# Altium PCB STM32F103RCT6_V2.1.pcbdoc (part 1 of 3)
Units mm, origin at the board's own origin, x right, y up, seen from the top; angles counter-clockwise.
Board outline 90.04 x 74.73 mm, 2 copper layers (Top Layer, Bottom Layer); 58 components, 75 nets, 672 pads, 147 vias.
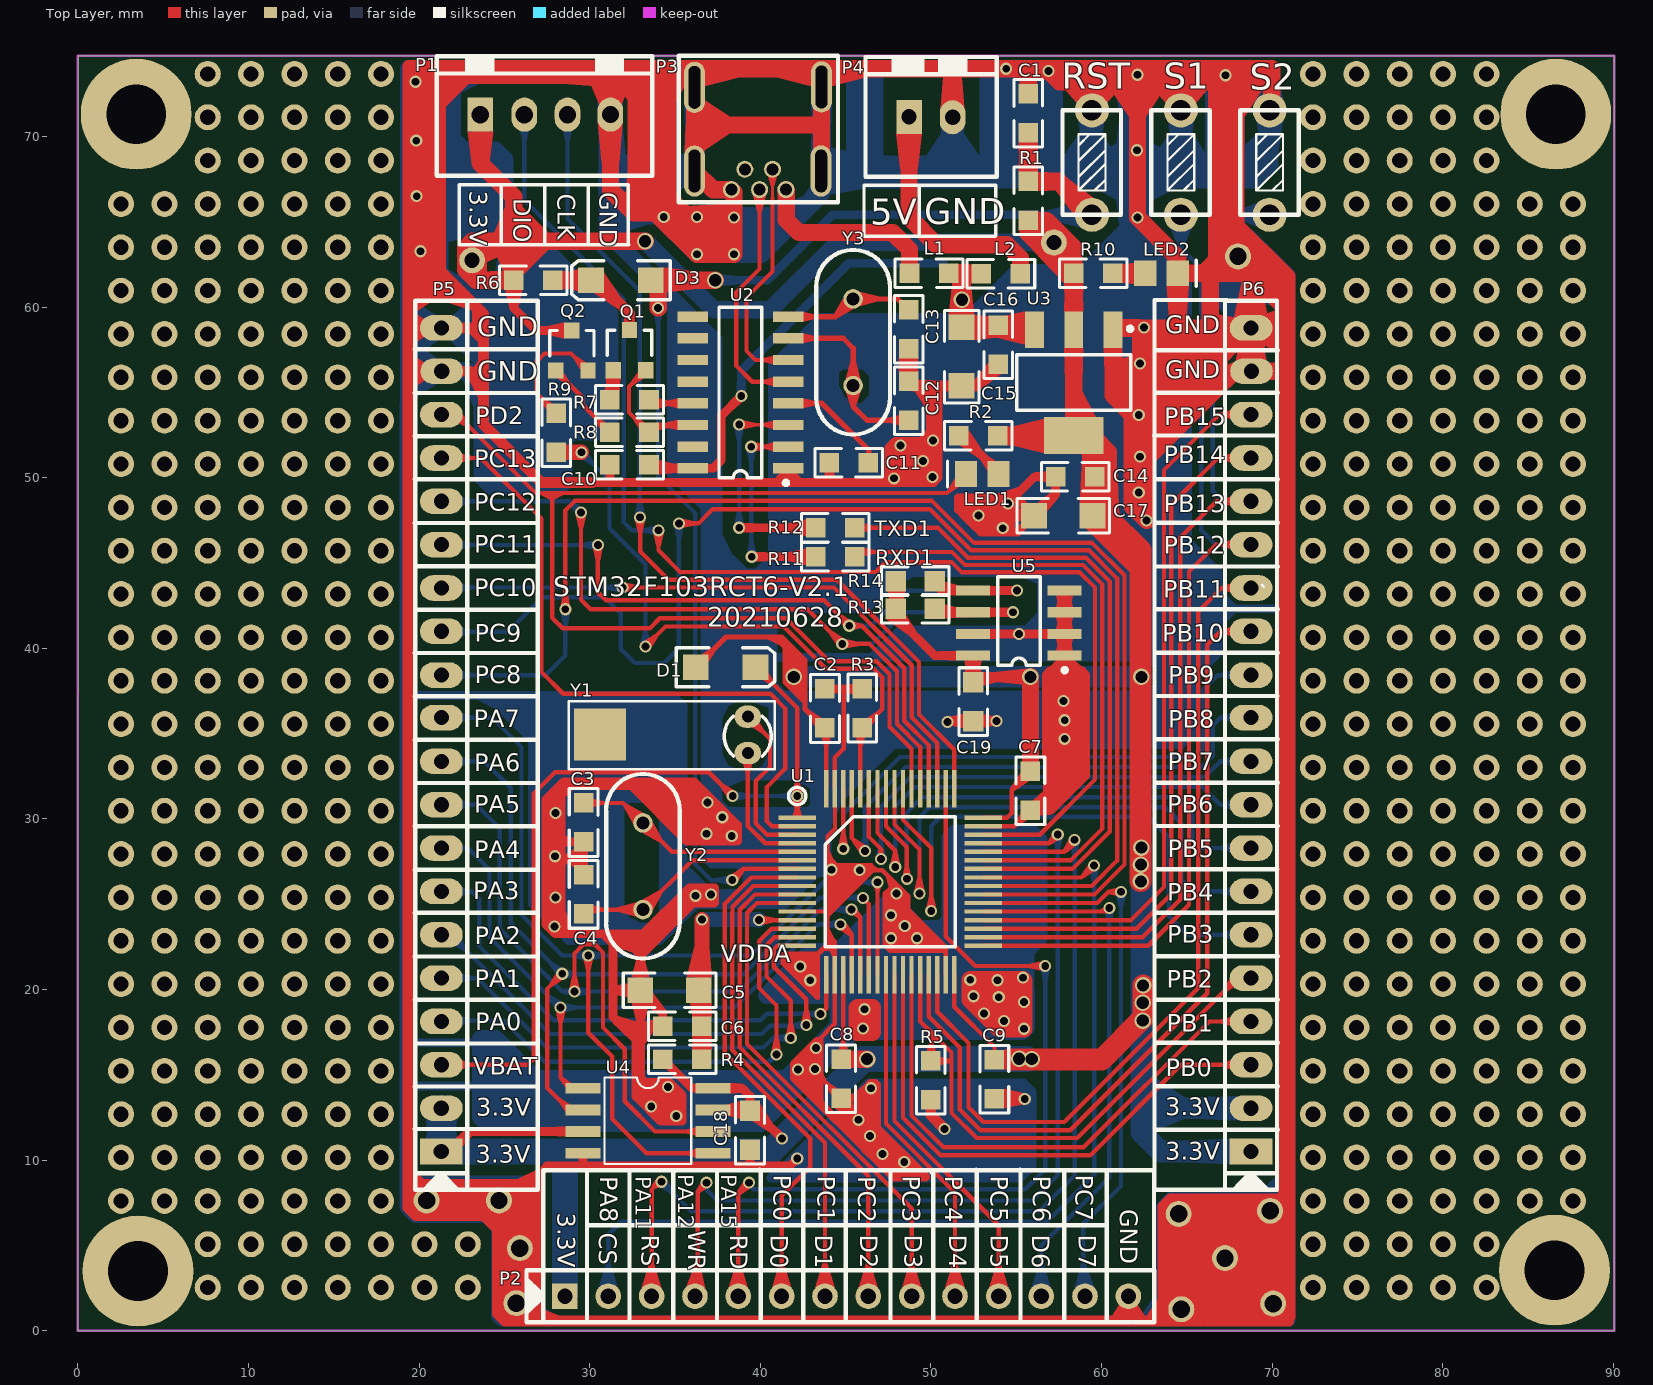
[diagram p0: Top Layer view]
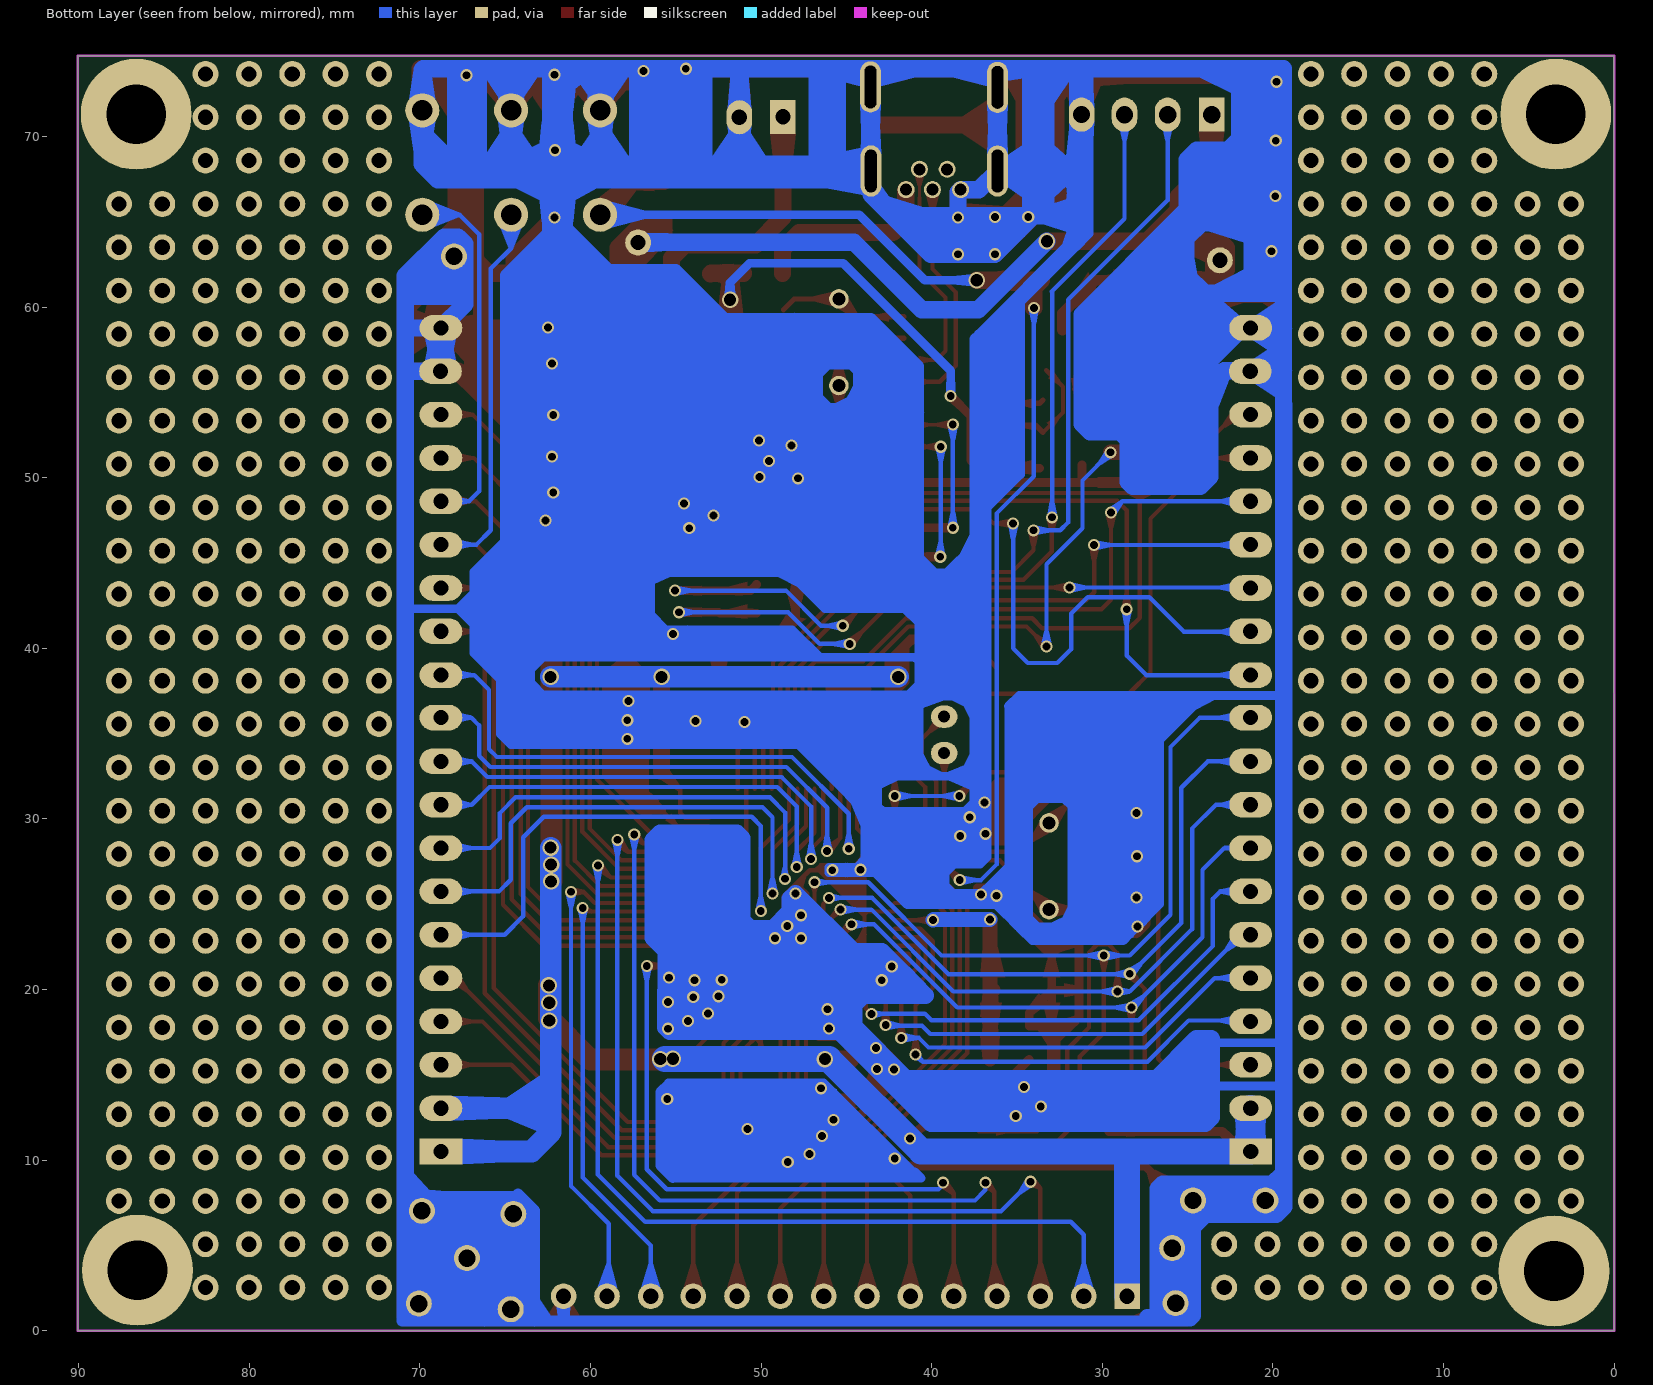
[diagram p1: Bottom Layer view, seen from below]

## Layer stack, top to bottom
Top Solder: solder mask 0.0102, Solder Resist, Dk 3.5
Top Layer: signal copper 0.0356
Dielectric 1: dielectric 0.32, FR-4, Dk 4.8
Bottom Layer: signal copper 0.0356
Bottom Solder: solder mask 0.0102, Solder Resist, Dk 3.5

## Board outline
0.024,74.727 90.043,74.727 90.043,0 0,0

## Design rules (kind name [scope] priority, off if disabled: settings)
Clearance [All] p1: gap=0.178
ComponentClearance [All] p1 off: gap=0.254 collisioncheckmode=3 verticalgap=0.254 showdistances=FALSE
MinimumSolderMaskSliver [All] p1: minsoldermaskwidth=0.178
PolygonConnect [All] p1: connectstyle=Relief reliefconductorwidth=0.254 reliefentries=4 polygonreliefangle="90 Angle" airgapwidth=0.254
RoutingVias [All] p1: holewidth=0.711 width=1.27 viastyle="Through Hole" minholewidth=0.711 minwidth=1.27 maxholewidth=0.711 maxwidth=1.27
SilkToBoardRegionClearance [All] p1 off:
SilkToSilkClearance [All] p1 off: silktosilkclearance=0.254
SilkToSolderMaskClearance [IsPad] p1 off: minsilkscreentomaskgap=0.254 clearancetoexposedcopper=TRUE
SolderMaskExpansion [All] p1: expansion=0.102
Width [All] p1: maxlimit=2.54 minlimit=0.178 preferedwidth=0.254 minimp=50.000000 maximp=50.000000 favimp=50.000000
25 further rules are at their usual default settings.

## Components (designator, comment, footprint, x,y, rotation, side; value= is the part's Value field where it differs from the comment)
C1 "104" 0805#1 55.702,72.492 r270 top
C2 "104" 0805#1 43.79,35.331 r90 top
C3 "22P" 0805#1 29.642,28.651 r90 top
C4 "22P" 0805#1 29.642,26.721 r270 top
C5 "10uF" 1206 36.398,19.964 r180 top
C6 "104" 0805#1 36.576,17.856 r180 top
C7 "104" 0805#1 55.829,32.791 r270 top
C8 "104" 0805#1 44.729,15.926 r270 top
C9 "104" 0805#1 53.721,15.9 r270 top
C10 "0.1uF" 0805#1 33.477,50.749 r180 top
C11 "0.1uF" 0805#1 44.044,50.876 r0 top
C12 "22P" 0805#1 48.692,55.651 r270 top
C13 "22P" 0805#1 48.692,57.556 r90 top
C14 "104" 0805#1 59.588,50.063 r180 top
C15 "10uF" 1206 51.791,58.801 r270 top
C16 "104" 0805#1 53.95,58.928 r270 top
C17 "10uF" 1206 59.461,47.777 r180 top
C18 "104" 0805#2 39.395,10.617 r90 top
C19 "104" 0805#2 52.476,38.024 r270 top
D1 "1N4148" "二极管 贴片 IN4148" 36.22,38.887 r0 top
D3 "1N4148" "二极管 贴片 IN4148" 33.579,61.57 r180 top
L1 "500mA" 0805#1 51.029,61.976 r180 top
L2 "500mA" 0805#1 52.959,61.951 r0 top
LED1 "红色" LED0805 53.95,50.216 r180 top
LED2 "红色" LED0805 62.56,61.976 r0 top
P1 "XH2.54-4" VH2.54_4 23.597,71.272 r180 top
P2 "2.54 1*14" "单排插针 2.54 1*14" 28.55,2.032 r0 top
P3 "USB-MINI座" "USB MINI DIP" 41.504,66.878 r270 top
P4 "power" VH2.54_2 48.717,71.145 r180 top
P5 "2.54 1*20" "单排插针 2.54 1*20" 21.311,10.516 r90 top
P6 "2.54 1*20" "单排插针 2.54 1*20" 68.758,10.516 r90 top
Q1 "8050" sot23b 32.334,58.649 r0 top
Q2 "8550" sot23b 28.956,58.623 r0 top
R1 "10K" 0805#1 55.702,65.075 r90 top
R2 "1K" 0805#1 53.924,52.451 r180 top
R3 "100K" 0805#1 45.974,37.643 r270 top
R4 "10R" 0805#1 34.29,15.926 r0 top
R5 "100K" 0805#1 49.987,13.538 r90 top
R6 "10K" 0805#1 27.838,61.57 r180 top
R7 "1K" 0805#1 31.191,54.559 r0 top
R8 "1K" 0805#1 31.191,52.654 r0 top
R9 "1K" 0805#1 28.042,51.486 r90 top
R10 "1K" 0805#1 60.655,61.976 r180 top
R11 "0" 0805#1 43.256,45.364 r0 top
R12 "0" 0805#1 43.256,47.066 r0 top
R13 "10k" 0805#2 47.93,42.316 r0 top
R14 "10k" 0805#2 47.93,43.942 r0 top
RST "key" "按键 轻触  6*3" 59.436,71.526 r0 top
S1 "key" "按键 轻触  6*3" 64.643,71.526 r0 top
S2 "key" "按键 轻触  6*3" 69.85,71.526 r0 top
U1 "STM32F103RCT6" LQFP64 42.164,30.074 r0 top
U2 "CH340G" SOIC16 41.504,50.546 r90 top
U3 "SPX1117M3-3.3" SOT223 60.681,58.674 r180 top
U4 "W25Q64" SO8-W 29.616,14.224 r0 top
U5 "24C02" SOIC8 57.836,39.573 r90 top
Y1 "32.768K" "晶振 卧 BCY-W2/D3.1" 39.268,35.992 r180 top
Y2 "8M" "晶振 BCY-W2/E4.7" 33.122,24.689 r90 top
Y3 "12M" "晶振 BCY-W2/E4.7" 45.441,55.397 r90 top

## Footprints (in the part's own frame and the unit in brackets; to place one, negate y for a bottom-side part, rotate by r counter-clockwise, add the part's x,y. Pads: shape width x height; smd on the part's side, far side on the other; paste and mask are expansions set on the pad)
0805#1 [mil]
  rect 45x45 smd: 1(0,0) 2(90,0)
  silkscreen extent -33,-33 123,33
0805#2 [mil]
  rect 47.24x47.24 smd: 1(0,0) 2(90,0)
  silkscreen extent -33,-33 123,33
1206 [mm]
  rect 1.5x1.5 smd: 1(-0.005,0) 2(3.424,0)
  silkscreen extent -1.01,-1.01 4.43,1.02
LED0805 [mm] "Chip Capacitor; Body 2.0 x 1.2 mm (LxW typ)"
  rect 1.3x1.5 smd: 1(0,0) 2(1.9,0)
  silkscreen extent 2.98,-0.76 2.98,0.76
LQFP64 [mm]
  rect 2.2x0.254 smd: 1(0,0) 2(0,-0.5) 3(0,-1) 4(0,-1.5) 5(0,-2) 6(0,-2.5) 7(0,-3) 8(0,-3.5) 9(0,-4) 10(0,-4.5) 11(0,-5) 12(0,-5.5) 13(0,-6) 14(0,-6.5) 15(0,-7) 16(0,-7.5) 33(10.9,-7.5) 34(10.9,-7) 35(10.9,-6.5) 36(10.9,-6) 37(10.9,-5.5) 38(10.9,-5) 39(10.9,-4.5) 40(10.9,-4) 41(10.9,-3.5) 42(10.9,-3) 43(10.9,-2.5) 44(10.9,-2) 45(10.9,-1.5) 46(10.9,-1) 47(10.9,-0.5) 48(10.9,0)
  rect 0.254x2.2 smd: 17(1.7,-9.2) 18(2.2,-9.2) 19(2.7,-9.2) 20(3.2,-9.2) 21(3.7,-9.2) 22(4.2,-9.2) 23(4.7,-9.2) 24(5.2,-9.2) 25(5.7,-9.2) 26(6.2,-9.2) 27(6.7,-9.2) 28(7.2,-9.2) 29(7.7,-9.2) 30(8.2,-9.2) 31(8.7,-9.2) 32(9.2,-9.2) 49(9.2,1.7) 50(8.7,1.7) 51(8.2,1.7) 52(7.7,1.7) 53(7.2,1.7) 54(6.7,1.7) 55(6.2,1.7) 56(5.7,1.7) 57(5.2,1.7) 58(4.7,1.7) 59(4.2,1.7) 60(3.7,1.7) 61(3.2,1.7) 62(2.7,1.7) 63(2.2,1.7) 64(1.7,1.7)
  silkscreen extent -0.51,-7.56 9.26,1.78
SO8-W [mil]
  rect 80x25 smd: 1(-0.4,0) 2(-0.4,-50) 3(-0.4,-100) 4(-0.4,-150) 5(299.6,-150) 6(299.6,-100) 7(299.6,-50) 8(299.6,0)
  silkscreen extent 50,-175 250,25
SOIC8 [mm]
  rect 0.6x2 smd: 1(0,0) 2(1.27,0) 3(2.54,0) 4(3.81,0) 5(3.81,5.367) 6(2.54,5.367) 7(1.27,5.367) 8(0,5.367)
  silkscreen extent -0.97,-0.13 4.62,3.93
SOIC16 [mil] "Small Outline; 16 Leads; Body Width 3.9 mm; Pitch 1.27 mm"
  rect 23.62x70 smd: 1(0,-5) 2(50,-5) 3(100,-5) 4(150,-5) 5(200,-5) 6(250,-5) 7(300,-5) 8(350,-5) 9(350,215) 10(300,215) 11(250,215) 12(200,215) 13(150,215) 14(100,215) 15(50,215) 16(0,215)
  silkscreen extent -38,-5 372,155
sot23b [mm]
  rect 0.9x0.95 smd: 1(-0.95,-2.35) 2(0.95,-2.35) 3(0,0)
  silkscreen extent -1.3,-1.48 1.3,0
SOT223 [mm] "SOT-223/SC-73; 4 Leads; Body 6.7 x 7.3 mm, inc. leads (LxW max)"
  rect 1.1x2.15 smd: 1(0.011,-0.001) 2(2.311,-0.001) 3(4.611,-0.001)
  rect 3.5x2.15 smd: 4(2.311,6.199)
  silkscreen extent -1.11,-0.18 5.66,4.72
"USB MINI DIP" [mm]
  round 1 hole 0.7: 1(0,0) 2(-1.194,-0.787) 3(0,-1.549) 4(-1.194,-2.413) 5(0,-3.2)
  oval 3x1.22 hole 0.7 slot 2.5 at 0 deg: 6(-1.093,-5.36) 7(-5.995,-5.36) 8(-1.093,2.057) 9(-6.02,2.082)
  silkscreen extent -7.85,-6.27 0.74,3.05
VH2.54_2 [mm]
  rect 1.5x2 hole 0.9: 1(0,0)
  oval 1.5x2 hole 0.9: 2(-2.55,0.025)
  silkscreen extent -5.14,-3.51 2.56,3.51
VH2.54_4 [mm]
  rect 1.5x2 hole 1.016: 1(0,0)
  oval 1.5x2 hole 1.016: 2(-2.58,0) 3(-5.105,0)
  oval 1.5x2 hole 1: 4(-7.62,0)
  silkscreen extent -10.06,-3.43 2.56,3.58
"二极管 贴片 IN4148" [mm] "SMT LED; 2 Flat Leads"
  rect 1.5x1.5 smd: 1(0,0) 2(3.5,0)
  silkscreen extent -1.15,-1.15 4.62,1.15
"单排插针 2.54 1*14" [mm]
  rect 1.5x1.5 hole 0.889: 1(0,0)
  round 1.5 hole 0.889: 2(2.54,0) 3(5.08,0) 4(7.62,0) 5(10.16,0) 6(12.7,0) 7(15.24,0) 8(17.78,0) 9(20.32,0) 10(22.86,0) 11(25.425,0) 12(27.915,0) 13(30.48,0) 14(33.02,0)
  silkscreen extent -2.25,-1.52 34.54,1.52
"单排插针 2.54 1*20" [mm]
  rect 1.5x2.5 hole 0.9: 1(0,0)
  oval 1.5x2.5 hole 0.9: 2(2.54,0)
  oval 1.5x2.5 hole 0.889: 3(5.08,0) 4(7.62,0) 5(10.16,0) 6(12.7,0) 7(15.24,0) 8(17.78,0) 9(20.32,0) 10(22.86,0) 11(25.425,0) 12(27.915,0) 13(30.48,0) 14(33.02,0) 15(35.56,0) 16(38.1,0) 17(40.64,0) 18(43.18,0) 19(45.72,-0.025) 20(48.26,0)
  silkscreen extent -2.25,-1.52 49.86,1.52
"按键 轻触  6*3" [mm]
  round 2 hole 1.2: 1(0,0) 2(0,-6.121)
  silkscreen extent -1.73,-6.12 1.7,0
"晶振 BCY-W2/E4.7" [mil] "Quartz Crystal, Thru-Hole; 2 Leads; Body 11.35 x 4.65 x 13.46 mm (LxWxH max)"
  round 45 hole 30: 1(0,0) 2(200,0)
  silkscreen extent -113,-85 313,85
"晶振 卧 BCY-W2/D3.1" [mm]
  oval 1.554x1.3 hole 0.7: 1(0,0) 2(0,2.134)
  rect 3.048x3.048 smd: ""(8.666,1.041)
  silkscreen extent -1.57,-0.91 10.49,3.07

## Part data
C1 C2 C3 C4 C5 C6 C7 C8 C9 C10 C11 C12 C13 C14 C15 C16 C17: library part "贴片电容 0805"
C18 C19: library part C, "无极性贴片电容"
D1 D3: library part "二极管 贴片 1N4148"
L1 L2: library part 保险_自恢复
LED1 LED2: library part "发光二极管 Φ3", "D_RED_D"
P1: library part "联结件 XH2.54-4"
P2: library part "联结件 单排插针 2.54 1*14"
P3: library part "联结件 USB-MINI座"
P4: library part "联结件 电源插头座"
P5 P6: library part "联结件 单排插针 2.54 1*20"
Q1: library part "三极管 贴片 NPN", "NPN 8050"
Q2: library part "三极管 贴片PNP", "PNP 8550"
R1 R4 R6 R7 R8 R9: library part "贴片电阻 0603"
R2 R3 R5 R10 R11 R12: library part "贴片电阻 0805"
R13 R14: library part R, "贴片电阻"
RST S1 S2: library part "按键 轻触 3*6"
U1: library part "贴片芯片 STM32F103RCT6"
U2: library part "贴片芯片 CH340G"
U3: library part "贴片芯片 SPX1117M3-5.0"
U4: library part W25Qxx, "外置Flash"
U5: library part 24Cxx, "外置EEPROM"
Y1 Y2 Y3: library part "晶振 直插矮"

## Free pads (board coordinates)
  round 6.5 hole 3.5: 0(3.429,71.298) 0(3.531,3.505) 0(86.538,3.556) 0(86.614,71.298)
  round 1.524 hole 1.016: 0(64.516,6.858) 1(69.875,7.036) 2(70.053,1.6) 3(64.668,1.27) 4(67.234,4.267) 5(20.447,7.645) 6(24.689,7.645) 7(25.705,1.626) 8(25.908,4.851) 9(67.996,62.967)
  round 1.524 hole 0.889: 2(2.54,7.62) 2(2.54,10.16) 2(2.54,12.7) 2(2.54,15.24) 2(2.54,17.78) 2(2.54,20.32) 2(2.54,22.86) 2(2.54,25.4) 2(2.54,27.94) 2(2.54,30.48) 2(2.54,33.02) 2(2.54,35.56) 2(2.54,38.1) 2(2.54,40.64) 2(2.54,43.18) 2(2.54,45.72) 2(2.54,48.26) 2(2.54,50.8) 2(2.54,53.34) 2(2.54,55.88) 2(2.54,58.42) 2(2.54,60.96) 2(2.54,63.5) 2(2.54,66.04) 2(5.08,7.62) 2(5.08,10.16) 2(5.08,12.7) 2(5.08,15.24) 2(5.08,17.78) 2(5.08,20.32) 2(5.08,22.86) 2(5.08,25.4) 2(5.08,27.94) 2(5.08,30.48) 2(5.08,33.02) 2(5.08,35.56) 2(5.08,38.1) 2(5.08,40.64) 2(5.08,43.18) 2(5.08,45.72) 2(5.08,48.26) 2(5.08,50.8) 2(5.08,53.34) 2(5.08,55.88) 2(5.08,58.42) 2(5.08,60.96) 2(5.08,63.5) 2(5.08,66.04) 2(7.62,2.54) 2(7.62,5.08) 2(7.62,7.62) 2(7.62,10.16) 2(7.62,12.7) 2(7.62,15.24) 2(7.62,17.78) 2(7.62,20.32) 2(7.62,22.86) 2(7.62,25.4) 2(7.62,27.94) 2(7.62,30.48) 2(7.62,33.02) 2(7.62,35.56) 2(7.62,38.1) 2(7.62,40.64) 2(7.62,43.18) 2(7.62,45.72) 2(7.62,48.26) 2(7.62,50.8) 2(7.62,53.34) 2(7.62,55.88) 2(7.62,58.42) 2(7.62,60.96) 2(7.62,63.5) 2(7.62,66.04) 2(7.62,68.58) 2(7.62,71.12) 2(7.62,73.66) 2(10.16,2.54) 2(10.16,5.08) 2(10.16,7.62) 2(10.16,10.16) 2(10.16,12.7) 2(10.16,15.24) 2(10.16,17.78) 2(10.16,20.32) 2(10.16,22.86) 2(10.16,25.4) 2(10.16,27.94) 2(10.16,30.48) 2(10.16,33.02) 2(10.16,35.56) 2(10.16,38.1) 2(10.16,40.64) 2(10.16,43.18) 2(10.16,45.72) 2(10.16,48.26) 2(10.16,50.8) 2(10.16,53.34) 2(10.16,55.88) 2(10.16,58.42) 2(10.16,60.96) 2(10.16,63.5) 2(10.16,66.04) 2(10.16,68.58) 2(10.16,71.12) 2(10.16,73.66) 2(12.7,2.54) 2(12.7,5.08) 2(12.7,7.62) 2(12.7,10.16) 2(12.7,12.7) 2(12.7,15.24) 2(12.7,17.78) 2(12.7,20.32) 2(12.7,22.86) 2(12.7,25.4) 2(12.7,27.94) 2(12.7,30.48) 2(12.7,33.02) 2(12.7,35.56) 2(12.7,38.1) 2(12.7,40.64) 2(12.7,43.18) 2(12.7,45.72) 2(12.7,48.26) 2(12.7,50.8) 2(12.7,53.34) 2(12.7,55.88) 2(12.7,58.42) 2(12.7,60.96) 2(12.7,63.5) 2(12.7,66.04) 2(12.7,68.58) 2(12.7,71.12) 2(12.7,73.66) 2(15.24,2.54) 2(15.24,5.08) 2(15.24,7.62) 2(15.24,10.16) 2(15.24,12.7) 2(15.24,15.24) 2(15.24,17.78) 2(15.24,20.32) 2(15.24,22.86) 2(15.24,25.4) 2(15.24,27.94) 2(15.24,30.48) 2(15.24,33.02) 2(15.24,35.56) 2(15.24,38.1) 2(15.24,40.64) 2(15.24,43.18) 2(15.24,45.72) 2(15.24,48.26) 2(15.24,50.8) 2(15.24,53.34) 2(15.24,55.88) 2(15.24,58.42) 2(15.24,60.96) 2(15.24,63.5) 2(15.24,66.04) 2(15.24,68.58) 2(15.24,71.12) 2(15.24,73.66) 2(17.78,2.54) 2(17.78,5.08) 2(17.78,7.62) 2(17.78,10.16) 2(17.78,12.7) 2(17.78,15.24) 2(17.78,17.78) 2(17.78,20.32) 2(17.78,22.86) 2(17.78,25.4) 2(17.78,27.94) 2(17.78,30.48) 2(17.78,33.02) 2(17.78,35.56) 2(17.78,38.1) 2(17.78,40.64) 2(17.78,43.18) 2(17.78,45.72) 2(17.78,48.26) 2(17.78,50.8) 2(17.78,53.34) 2(17.78,55.88) 2(17.78,58.42) 2(17.78,60.96) 2(17.78,63.5) 2(17.78,66.04) 2(17.78,68.58) 2(17.78,71.12) 2(17.78,73.66) 2(20.32,2.54) 2(20.32,5.08) 2(22.86,2.54) 2(22.86,5.08) 2(23.114,62.738) 2(57.201,63.779) 2(72.39,2.54) 2(72.39,5.08) 2(72.39,7.62) 2(72.39,10.16) 2(72.39,12.7) 2(72.39,15.24) 2(72.39,17.78) 2(72.39,20.32) 2(72.39,22.86) 2(72.39,25.4) 2(72.39,27.94) 2(72.39,30.48) 2(72.39,33.02) 2(72.39,35.56) 2(72.39,38.1) 2(72.39,40.64) 2(72.39,43.18) 2(72.39,45.72) 2(72.39,48.26) 2(72.39,50.8) 2(72.39,53.34) 2(72.39,55.88) 2(72.39,58.42) 2(72.39,60.96) 2(72.39,63.5) 2(72.39,66.04) 2(72.39,68.58) 2(72.39,71.12) 2(72.39,73.66) 2(74.93,2.54) 2(74.93,5.08) 2(74.93,7.62) 2(74.93,10.16) 2(74.93,12.7) 2(74.93,15.24) 2(74.93,17.78) 2(74.93,20.32) 2(74.93,22.86) 2(74.93,25.4) 2(74.93,27.94) 2(74.93,30.48) 2(74.93,33.02) 2(74.93,35.56) 2(74.93,38.1) 2(74.93,40.64) 2(74.93,43.18) 2(74.93,45.72) 2(74.93,48.26) 2(74.93,50.8) 2(74.93,53.34) 2(74.93,55.88) 2(74.93,58.42) 2(74.93,60.96) 2(74.93,63.5) 2(74.93,66.04) 2(74.93,68.58) 2(74.93,71.12) 2(74.93,73.66) 2(77.47,2.54) 2(77.47,5.08) 2(77.47,7.62) 2(77.47,10.16) 2(77.47,12.7) 2(77.47,15.24) 2(77.47,17.78) 2(77.47,20.32) 2(77.47,22.86) 2(77.47,25.4) 2(77.47,27.94) 2(77.47,30.48) 2(77.47,33.02) 2(77.47,35.56) 2(77.47,38.1) 2(77.47,40.64) 2(77.47,43.18) 2(77.47,45.72) 2(77.47,48.26) 2(77.47,50.8) 2(77.47,53.34) 2(77.47,55.88) 2(77.47,58.42) 2(77.47,60.96) 2(77.47,63.5) 2(77.47,66.04) 2(77.47,68.58) 2(77.47,71.12) 2(77.47,73.66) 2(80.01,2.54) 2(80.01,5.08) 2(80.01,7.62) 2(80.01,10.16) 2(80.01,12.7) 2(80.01,15.24) 2(80.01,17.78) 2(80.01,20.32) 2(80.01,22.86) 2(80.01,25.4) 2(80.01,27.94) 2(80.01,30.48) 2(80.01,33.02) 2(80.01,35.56) 2(80.01,38.1) 2(80.01,40.64) 2(80.01,43.18) 2(80.01,45.72) 2(80.01,48.26) 2(80.01,50.8) 2(80.01,53.34) 2(80.01,55.88) 2(80.01,58.42) 2(80.01,60.96) 2(80.01,63.5) 2(80.01,66.04) 2(80.01,68.58) 2(80.01,71.12) 2(80.01,73.66) 2(82.55,2.54) 2(82.55,5.08) 2(82.55,7.62) 2(82.55,10.16) 2(82.55,12.7) 2(82.55,15.24) 2(82.55,17.78) 2(82.55,20.32) 2(82.55,22.86) 2(82.55,25.4) 2(82.55,27.94) 2(82.55,30.48) 2(82.55,33.02) 2(82.55,35.56) 2(82.55,38.1) 2(82.55,40.64) 2(82.55,43.18) 2(82.55,45.72) 2(82.55,48.26) 2(82.55,50.8) 2(82.55,53.34) 2(82.55,55.88) 2(82.55,58.42) 2(82.55,60.96) 2(82.55,63.5) 2(82.55,66.04) 2(82.55,68.58) 2(82.55,71.12) 2(82.55,73.66) 2(85.09,7.62) 2(85.09,10.16) 2(85.09,12.7) 2(85.09,15.24) 2(85.09,17.78) 2(85.09,20.32) 2(85.09,22.86) 2(85.09,25.4) 2(85.09,27.94) 2(85.09,30.48) 2(85.09,33.02) 2(85.09,35.56) 2(85.09,38.1) 2(85.09,40.64) 2(85.09,43.18) 2(85.09,45.72) 2(85.09,48.26) 2(85.09,50.8) 2(85.09,53.34) 2(85.09,55.88) 2(85.09,58.42) 2(85.09,60.96) 2(85.09,63.5) 2(85.09,66.04) 2(87.63,7.62) 2(87.63,10.16) 2(87.63,12.7) 2(87.63,15.24) 2(87.63,17.78) 2(87.63,20.32) 2(87.63,22.86) 2(87.63,25.4) 2(87.63,27.94) 2(87.63,30.48) 2(87.63,33.02) 2(87.63,35.56) 2(87.63,38.1) 2(87.63,40.64) 2(87.63,43.18) 2(87.63,45.72) 2(87.63,48.26) 2(87.63,50.8) 2(87.63,53.34) 2(87.63,55.88) 2(87.63,58.42) 2(87.63,60.96) 2(87.63,63.5) 2(87.63,66.04)

## Via types
v1: diameter 0.711, hole 0.457, Top Layer to Bottom Layer, 132 vias
v2: diameter 0.965, hole 0.711, Top Layer to Bottom Layer, 15 vias

## Nets (pads, with @x,y where several pads share a name; then routed paths per layer and width w, separated by ;. In a path a pad name is that pad's centre, name@x,y a point inside that pad or via, vN(x,y) a via of type N, cw(c..) or ccw(c..) an arc to the next point about the centre after c; other vN are vias at no path point)
3.3V: C2.1 C7.1 C8.1 C9.1 C14.1 C17.1 C18.2 C19.1 D1.1 P1.1 P2.1 P5.1 P5.2 P6.1 P6.2 pad.2@23.114,62.738 pad.2@57.201,63.779 Q2.3 R1.1 R2.1 R4.1 R6.2 R10.2 R13.1 R14.1 U1.19 U1.32 U1.48 U1.64 U3.2 U3.4 U4.3 U4.7 U4.8 U5.8 | length 317.4
  Top Layer w0.254: U1.64@43.864,31.774 C2.1@43.864,35.257 ; C8.1@44.729,15.926 44.864,16.06 U1.19@44.864,20.874 ; U1.32@51.364,20.874 51.364,18.994 53.721,16.637 C9.1@53.721,15.9 ; U1.48@53.064,30.074 54.458,30.074 54.737,30.353 54.737,31.699 C7.1@55.829,32.791
  Top Layer w0.305: D1.1@36.22,38.887 37.998,40.665 40.869,40.665 ; C2.1@43.561,35.509 42.621,36.449 ; 40.869,40.665 41.453,40.081 41.453,38.024 42.291,37.186 ; 40.869,40.665 41.258,40.665 42.621,39.302 42.621,37.186 ; 42.291,37.186 42.621,37.186 ; 42.291,37.186 42.621,36.855 ; 42.621,36.449 42.621,36.855 ; 42.621,36.449 42.621,36.855 ; 42.621,36.855 42.621,37.186
  Top Layer w0.508: P5.1@21.311,10.516 21.819,10.516 22.987,11.684 U4.3@29.606,11.684 ; R6.2@25.552,61.57 25.552,59.944 26.873,58.623 Q2.3@28.956,58.623 ; R4.1@34.29,15.926 35.992,14.224 U4.8@37.226,14.224 38.938,14.224 39.395,13.767 C18.2@39.395,12.903 ; U4.7@37.226,12.954 39.345,12.954 C18.2@39.395,12.903 ; v1(41.275,11.278) 39.649,12.903 C18.2@39.395,12.903 ; R14.1@47.981,43.739 47.981,42.062 47.981,41.808 50.216,39.573 U5.8@52.469,39.573 52.469,38.031 C19.1@52.476,38.024 52.781,38.329 v2(55.829,38.329) ; U3.4@58.345,52.451 U3.4@58.369,52.475
  Top Layer w0.889: U3.4@58.369,52.475 59.487,51.358 59.588,51.256
  Top Layer w1.016: P1.1@23.597,71.272 23.597,68.428 25.552,66.472 25.552,63.856 ; v2(33.249,63.856) 25.552,63.856 ; C8.1@44.729,15.926 v2(46.253,15.926) ; R2.1@53.924,52.451 U3.4@58.345,52.451 ; C7.1@55.829,32.791 v2(55.829,38.329) ; 59.588,51.256 U3.4@59.588,52.299 ; 60.566,46.419 60.401,46.584 60.401,47.625 60.401,51.486 U3.4@59.588,52.299 ; pad.2@22.733,62.179 23.343,61.57 ; pad.2@22.733,62.179 pad.2@23.47,62.916 ; pad.2@22.733,62.179 22.733,63.475 23.114,63.856 24.409,63.856 ; 23.343,61.57 R6.2@25.552,61.57 25.552,63.856 ; 23.343,61.57 23.47,61.697 pad.2@23.47,62.916 ; pad.2@23.47,62.916 24.409,63.856 ; 24.409,63.856 25.552,63.856 ; R1.1@55.702,65.075 56.769,65.075 58.369,63.475 R10.2@58.369,62.408 ; R1.1@55.702,65.075 R10.2@58.369,62.408 ; R1.1@55.702,65.075 55.702,64.313 58.039,61.976 R10.2@58.369,61.976 R10.2@58.369,62.408 ; 58.369,53.848 U3.4@58.369,52.475 59.412,52.475 U3.4@59.588,52.299 ; 58.369,53.848 U3.2@58.369,58.675 R10.2@58.369,62.408 ; 58.369,53.848 59.588,52.629 U3.4@59.588,52.299
  Top Layer w1.27: 54.585,15.9 59.995,15.9 62.433,18.339 v2(62.433,20.244) ; C17.1@59.466,47.777 C17.1@59.487,47.777 ; U3.4@59.487,51.486 59.487,51.358 C17.1@59.487,47.777 ; 60.401,46.584 59.487,47.498 C17.1@59.487,47.777 ; 60.566,46.419 62.281,44.704 ; v2@62.281,26.351 62.281,44.704 ; C17.1@59.487,47.777 60.249,47.777 60.401,47.625 62.281,45.745 62.281,44.704
  Bottom Layer w1.016: v2(33.249,63.856) 37.262,59.842 40.589,59.842 44.552,63.805 56.972,63.805 pad.2@57.175,63.602
  Bottom Layer w1.27: v2(41.961,38.329) v2(55.829,38.329) v2(62.332,38.329) ; v2(62.332,28.321) 62.332,13.056 ; P6.1@68.758,10.516 63.449,10.516 62.332,11.633 62.332,13.056 ; P6.2@68.758,13.056 62.332,13.056
  Bottom Layer w1.524: P5.2@21.311,13.056 P5.1@21.311,10.516 40.615,10.516 46.025,15.926 v2(46.253,15.926) v2@55.626,15.926 ; P2.1@28.55,2.032 28.55,10.389
  other v2: 55.905,15.926 55.169,15.951 62.408,18.186 62.408,19.228 62.306,26.34 62.306,27.33
5V: C10.1 C15.1 C16.1 L1.1 L2.1 U2.16 U3.3 | length 36.1
  Top Layer w0.508: C10.1@33.68,50.546 U2.16@36.043,50.546 37.236,50.546 37.719,51.029 37.719,53.619 v1(38.887,54.788)
  Top Layer w1.016: L1.1@51.029,61.976 52.934,61.976 L2.1@52.959,61.951 ; 51.791,61.874 C15.1@51.791,58.806 U3.3@55.938,58.806
  Bottom Layer w0.508: v1(38.887,54.788) 38.887,56.261 45.187,62.56 50.673,62.56 51.816,61.417 v2(51.816,60.427)
BOOT0: R3.2 R9.1 U1.60 | length 36.9
  Top Layer w0.254: v1(33.274,40.107) 34.442,41.275 41.377,41.275 43.84,38.811 46.629,38.811 47.142,38.298 47.142,36.449 46.05,35.357 R3.2@45.974,35.357 ; U1.60@45.864,31.774 R3.2@45.864,35.247
  Top Layer w0.889: R9.1@28.042,51.486 v1(29.515,51.486)
  Bottom Layer w0.254: v1(29.515,51.486) 31.166,49.835 31.166,47.041 33.274,44.933 v1(33.274,40.107)